# Altium PCB sim908-v5.PcbDoc
Units mil, origin at the board's own origin, x right, y up, seen from the top; angles counter-clockwise.
Board outline 9783 x 7978 mil, 2 copper layers (Top Layer, Bottom Layer); 67 components, 0 nets, 297 pads, 100 vias.
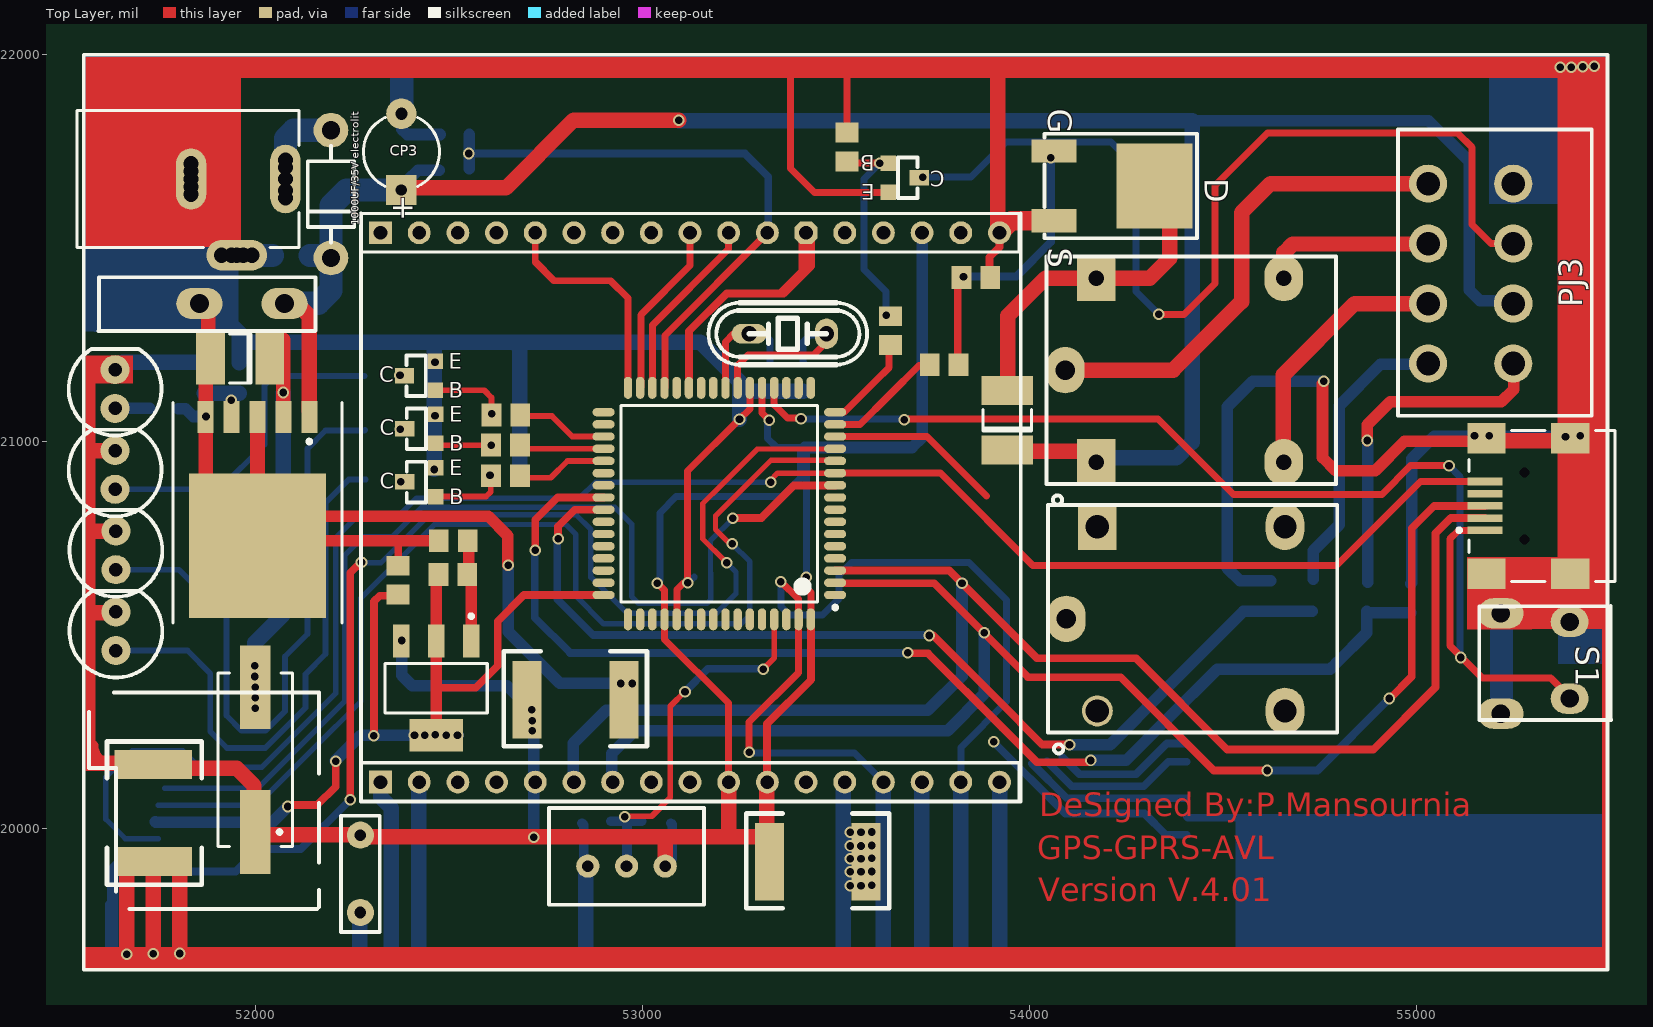
[diagram p0: Top Layer view]
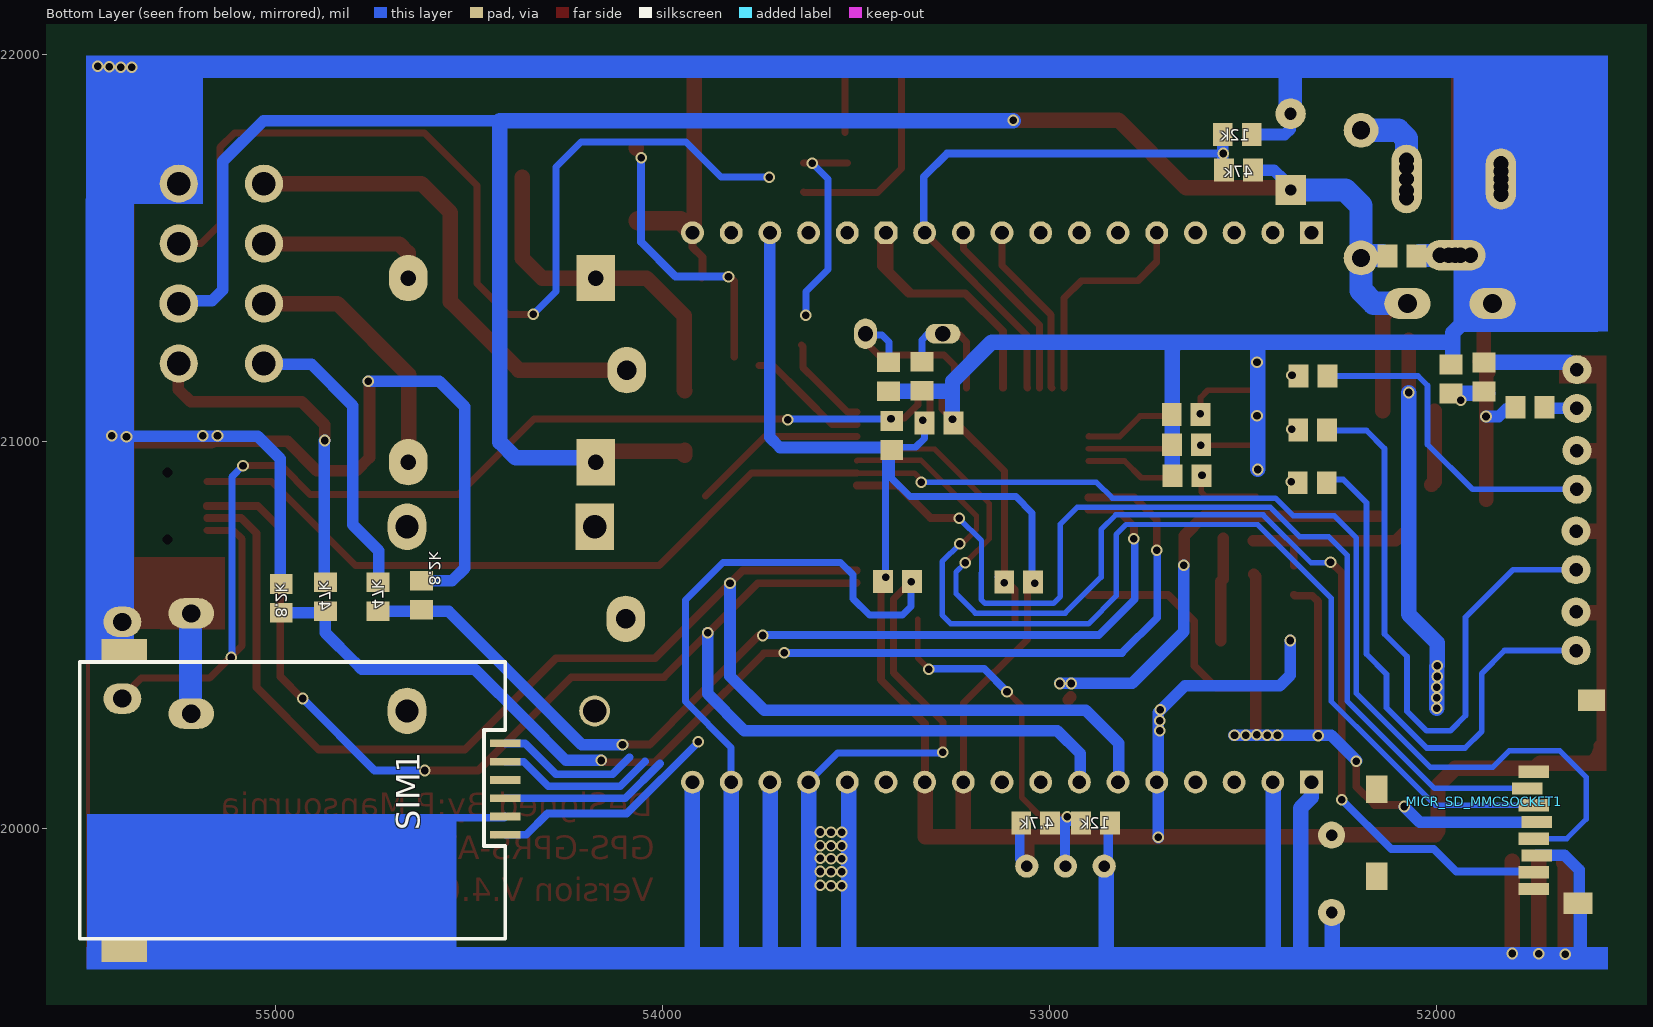
[diagram p1: Bottom Layer view, seen from below]

## Layer stack, top to bottom
Top Layer: signal copper 1.4
Dielectric: dielectric 12.6, FR-4, Dk 4.8
Bottom Layer: signal copper 1.4

## Board outline
48479,25131 48522,25174 58131,25174 58131,17327 58240,17218 58218,17196 48457,17196

## Design rules (kind name [scope] priority, off if disabled: settings)
Clearance [All] p1: gap=10
PolygonConnect [All] p1: connectstyle=Relief reliefconductorwidth=10 reliefentries=4 polygonreliefangle="90 Angle"
RoutingVias [All] p1: holewidth=28 width=50 viastyle="Through Hole" minholewidth=28 minwidth=50 maxholewidth=28 maxwidth=50
SilkscreenOverComponentPads [All] p1: minsilkscreentomaskgap=10
SolderMaskExpansion [All] p1: expansion=4
Width [All] p1: maxlimit=10 minlimit=10 preferedwidth=10
27 further rules are at their usual default settings.

## Components (designator, comment, footprint, x,y, rotation, side; value= is the part's Value field where it differs from the comment)
CP3 "1000UF/35V electrolit" CAPPR5-5x5 52376,21749 r90 top (schematic designator CP2)
MICR_SD_MMCSOCKET1 "" "PCBComponent_1 - duplicate" 51748,20147 r270 bottom locked
PJ3 "PowerCon8" HDRB2*4 55250,21667 r270 top
S1 "SW-PB" SW2 55396,20336 r270 top locked
SIM1 "SIMCard1" SIMCard1 54406,20220 r90 bottom locked
? "Comment" Relay_2#1 54635,20274 r90 top
? "Comment" USB/SM0.8-6H5 55486,20834 r0 top
? "Comment" 2012[0805] 51757,21089 r180 bottom
? "Comment" 2012[0805] 51961,21162 r90 bottom
? "Comment" 2012[0805] 51876,21167 r90 bottom
? "Comment" 2220 53577,19914 r180 top
? "Comment" MKT 52270,19783 r90 top
? "Comment" 2220 51735,19915 r90 top
? "Comment" 1812 51959,21215 r180 top
? "Comment" 2012[0805] 52088,21480 r0 bottom
? "Comment" "Diode Zener" 52164,21645 r270 top
? "Comment" Relay_2#2 54632,20917 r90 top
? "Comment" HDR1X17#1 52322,21540 r0 top locked
? "Comment" HDR1X17#2 52322,20120 r0 top locked
? "Comment" power 51537,21679 r0 top
? "Comment" LED1 51656,21096 r90 top locked
? "Comment" LED1 51656,20887 r90 top locked
? "Comment" LED1 51658,20470 r90 top locked
? "Comment" LED1 51658,20679 r90 top locked
? "Comment" ATMEGA128 53218,20840 r180 top
? "Comment" LM2576 52004,20897 r180 top
? "Comment" HC49/4H_SMX 51998,20178 r90 top
? "Comment" 2012[0805] 53392,20639 r180 bottom
? "Comment" 2012[0805] 53079,20637 r180 bottom
? "Comment" 2012[0805] 53285,21048 r180 bottom
? "Comment" 2012[0805] 53407,21016 r270 bottom
? "Comment" X2P 53375,21279 r0 top
? "Comment" 2012[0805] 53329,21169 r270 bottom
? "Comment" 2012[0805] 53415,21168 r270 bottom
? "" DPAK 54063,21751 r270 top
? "Comment" "mokhaberati 3pin" 53058,19903 r180 top
? "Comment" 2012[0805] 52880.4,20014 r0 bottom
? "Comment" 2012[0805] 53035,20014 r0 bottom
? "Comment" 2012[0805] 52511,21702 r180 bottom
? "Comment" 2012[0805] 52514,21794 r180 bottom
? "Comment" 2012[0805] 52646,21069 r0 top
? "Comment" 2012[0805] 52645,20991 r0 top
? "Comment" 2012[0805] 52645,20912 r0 top
? "Comment" SMD-tr 52464,21133 r0 top
? "Comment" SMD-tr 52465,20996 r0 top
? "Comment" SMD-tr 52465,20858 r0 top
? "Comment" 2012[0805] 52646,21070 r180 bottom
? "Comment" 2012[0805] 52645,20992 r180 bottom
? "Comment" 2012[0805] 52644,20912 r180 bottom
? "Comment" 2012[0805] 52318,21170 r180 bottom
? "Comment" 2012[0805] 52319,21030 r180 bottom
? "Comment" 2012[0805] 52320,20894 r180 bottom
? "Comment" 2012[0805] 53779,21199 r0 top
? "Comment" 2012[0805] 53861,21424 r180 top
? "Comment" 1812 53942,21055 r90 top
? "Comment" 2012[0805] 53640,21287 r90 top
? "Comment" SMD-tr 53635,21720 r180 top
? "Comment" 2012[0805] 53528,21762 r90 top
? "Comment" 2012[0805] 54871,20599 r270 bottom
? "Comment" 2012[0805] 54985,20595 r270 bottom
? "Comment" 2012[0805] 54735,20599 r90 bottom
? "Comment" 2012[0805] 54623,20603 r90 bottom
? "Comment" SOT223 52466,20363 r180 top
? "Comment" 2012[0805] 52509,20657 r0 top
? "Comment" 2012[0805] 52510,20744 r0 top
? "Comment" 2220 52951,20333 r180 top
? "Comment" 2012[0805] 52367,20642 r90 top

## Footprints (in the part's own frame and the unit in brackets; to place one, negate y for a bottom-side part, rotate by r counter-clockwise, add the part's x,y. Pads: shape width x height; smd on the part's side, far side on the other; paste and mask are expansions set on the pad)
1812 [mm] "Chip Capacitor; Body 4.5 x 3.2 mm (LxW typ)"
  rect 1.9x3.4 smd: 1(-1.95,0) 2(1.95,0)
  silkscreen extent -0.7,-1.6 0.7,1.6
2012[0805] [mm] "Chip Resistor; Body 2.0 x 1.3 mm (LxW typ)"
  rect 1.3x1.5 smd: 1(-0.95,0) 2(0.95,0)
2220 [mil]
  rect 75x200 smd: GND(0,0) VCC(250,0)
  silkscreen extent -60,-125 310,120
ATMEGA128 [mm] "mega128-64"
  oval 1.45x0.55 smd: 1PIN(-7.092,6) 2(-7.092,5.2) 3(-7.092,4.4) 4(-7.092,3.6) 5(-7.092,2.8) 6(-7.092,2) 7(-7.092,1.2) 8(-7.092,0.4) 9(-7.092,-0.4) 10(-7.092,-1.2) 12(-7.092,-2.8) 13(-7.092,-3.6) 14(-7.092,-4.4) 15(-7.092,-5.2) 16(-7.092,-6) 33(8.108,-6) 34(8.108,-5.2) 35(8.108,-4.4) 36(8.108,-3.6) 37(8.108,-2.8) 38(8.108,-2) 39(8.108,-1.2) 40(8.108,-0.4) 41(8.108,0.4) 42(8.108,1.2) 43(8.108,2) 44(8.108,2.8) 45(8.108,3.6) 46(8.108,4.4) 47(8.108,5.2) 48(8.108,6) CLK(-7.092,-2)
  oval 0.55x1.45 smd: 17(-5.492,-7.6) 18(-4.692,-7.6) 19(-3.892,-7.6) 20RST(-3.092,-7.6) 21VCC(-2.292,-7.6) 22GND(-1.492,-7.6) 23XTALL(-0.692,-7.6) 24XTALL(0.108,-7.6) 25(0.908,-7.6) 26(1.708,-7.6) 27(2.508,-7.6) 28(3.308,-7.6) 29(4.108,-7.6) 30(4.908,-7.6) 31(5.708,-7.6) 32(6.508,-7.6) 49(6.508,7.6) 50(5.708,7.6) 51(4.908,7.6) 52VCC(4.108,7.6) 53GND(3.308,7.6) 54(2.508,7.6) 55(1.708,7.6) 56(0.908,7.6) 57(0.108,7.6) 58(-0.692,7.6) 59(-1.492,7.6) 60(-2.292,7.6) 61(-3.092,7.6) 62AREF(-3.892,7.6) 63GND(-4.692,7.6) 64AVCC(-5.492,7.6)
  silkscreen extent -7.22,-6.45 6.96,6.95, body extent -6.49,-7 7.51,7, height 1.2
CAPPR5-5x5 [mm] "Capacitor, Electrolytic, Radial; Body 5 x 5 mm (Dia.xH typ); Pin Spacing 5 mm (typ)"
  rect 2x2 hole 0.75: 1(-2.5,0)
  round 2 hole 0.8: 2(2.5,0)
  silkscreen extent -2.26,-2.5 2.27,2.5
"Diode Zener" [mil]
  round 90 hole 47: A(-160,30) K(170,30)
  silkscreen extent -120,-30 130,90
DPAK [mil]
  rect 60x116 smd: 1(0,0) 3(180,0)
  rect 220x196 smd: 2(90,260)
  silkscreen extent -45,-25 225,370
HC49/4H_SMX [mm] "Quartz Crystal, SM; Body 13.4 (inc. leads) x 4.9 mm (LxW max)"
  rect 5.5x2 smd: 1(-4.75,0) 2(4.75,0)
  silkscreen extent -5.7,-2.45 5.7,2.45
HDR1X17#1 [mm] "Connector; Header; 17 Position"
  rect 1.5x1.5 hole 0.9: 1(0,0)
  round 1.5 hole 0.9: 2(2.54,0) 3(5.08,0) 4(7.62,0) 5led(10.16,0) 6(12.7,0) 7(15.24,0) 8(17.78,0) 9ring(20.32,0) 10pwr(22.86,0) 11(25.4,0) 13(30.48,0) 14(33.02,0) 15vcc(35.56,0) 16(38.1,0) 17(40.64,0)
  oct 1.5x1.5 hole 0.9: 12rxgps(27.94,0)
  silkscreen extent -1.27,-1.27 41.91,1.27
HDR1X17#2 [mm] "Connector; Header; 17 Position"
  rect 1.5x1.5 hole 0.9: 1(0,0)
  round 1.5 hole 0.9: 2(2.54,0) 3(5.08,0) 4(7.62,0) 5(10.16,0) "6rx gsm"(12.7,0) "7 tx gsm"(15.24,0) 8(17.78,0) 9(20.32,0) 10(22.86,0) 11(25.4,0) 12(27.94,0) 13(30.48,0) 14(33.02,0) 15(35.56,0) 16(38.1,0) 17(40.64,0)
  silkscreen extent -1.27,-1.27 41.91,1.27
HDRB2*4 [mil]
  round 98.43 hole 61: A-c5(465,0) A-c6(465,-220) ALARM(155,0) GND(0,0) R(0,-220) R(155,-220) R(310,-220)
  oval 98.43x100.39 hole 61: VDD-12V(310,0)
  silkscreen extent -140,-298 600,203
LED1 [mil]
  round 75 hole 35: 1(-10,20) 2(90,20)
  silkscreen extent -80,-100 144,140
LM2576 [mm]
  rect 1.05x2.1 smd: 1(-3.4,-4.225) 2(-1.7,-4.225) 3(0,-4.225) 4(1.7,-4.225) 5(3.4,-4.225)
  rect 9x9.5 smd: 6(0,4.225)
  silkscreen extent -5.55,-5.17 5.55,9.28
MKT [mil]
  round 70 hole 30: 1(0,0) 2(200,0)
  silkscreen extent -50,-50 250,50
"mokhaberati 3pin" [mil] "3pin"
  round 60 hole 30: 0(0,0) 1(100,0) 2(200,0)
  silkscreen extent -100,-150 300,100
"PCBComponent_1 - duplicate" [mm]
  rect 0.8x2 smd: 1(0,0) 2(1.1,-0.4) 3(2.2,0) 4(3.3,0.2) 5(4.4,0) 6(5.5,0.2) 7(6.6,0) 8(7.7,0)
  rect 1.4x1.9 smd: 9(8.643,2.918)
  rect 1.8x1.4 smd: 10(6.865,-10.29) 11(1.15,-10.29)
  rect 1.4x1.75 smd: 12(-4.692,3.807)
power [mm] "DC Power Jack, 2.5mm, KLD Series, PCB Mount"
  round 1.5 hole 1: 0(7.5,-0.508) 0(7.5,0) 0(7.5,0.508) 0(10.16,-5) 0(10.922,-5) 0(13.7,-0.762) 0(13.7,0.762) 1(13.7,0) 1A(13.7,-1.25) 1B(13.7,1.25) 2(10.5,-5) 2A(7.5,-1) 2B(7.5,1) 3A(9.5,-5) 3B(11.5,-5)
  oval 2x4.5 all layers, no hole: 1(13.7,0)
  oval 2x4 all layers, no hole: 2(7.5,0)
  oval 4x2 all layers, no hole: 3(10.5,-5)
  silkscreen extent 0,-4.5 14.6,4.5
Relay_2#1 [mil]
  round 80 hole 60: 1(30,460)
  oval 120x100 hole 60: 2(30,-25) 3(506,-25)
  rect 120x100 hole 60: 4(506,460)
  oval 120x100 hole 50: 5(268,540)
  silkscreen extent -80,-160 562,588
Relay_2#2 [mil]
  rect 120x100 hole 40: 1(30,460) 4(506,460)
  oval 120x100 hole 40: 2(30,-25) 3(506,-25)
  oval 120x100 hole 50: 5(268,540)
  silkscreen extent -80,-160 562,588
SIMCard1 [mm]
  rect 1.524x3 smd: 0(-13.589,25.019) 0(6.096,25.019)
  rect 0.5x2 smd: 1(SIM-VCC)(-6,0) 2(SIM_RST)(-3.6,0) 3(SIM_CLK)(-1.2,0) 4(GND)(-4.8,0) 5(-2.4,0) 6(SIM_DATA)(0,0)
  silkscreen extent -12.83,0 5.33,27.94
SMD-tr [mil]
  rect 40x40 smd: 1(0,0) 2(0,75)
  rect 50x40 smd: 3(-80,38)
  silkscreen extent -75,-15 -25,90
SOT223 [mm] "SOT-223/SC-73; 4 Leads; Body 6.7 x 7.3 mm, inc. leads (LxW max)"
  rect 1.1x2.15 smd: 1adj(-2.3,-3.1) 2(0,-3.1) 3In(2.3,-3.1)
  rect 3.5x2.15 smd: 4(0,3.1)
  silkscreen extent -3.35,-4.85 3.35,1.63
SW2 [mm]
  oval 2x2.5 hole 1.2: 1(0,0) 2(-5.029,-0.001)
  oval 2x3 hole 1.2: 3(0.991,-4.522) 4(-5.588,-4.522)
  round 0 all layers, no hole: 8(-4.648,-5.562) 9(-0.457,-5.638)
  silkscreen extent -6.07,-5.94 1.4,2.72
USB/SM0.8-6H5 [mm] "Connector; USB2.0, Type B, SM; 5 Position; Right Angle"
  rect 2.3x0.5 smd: 1rst(-7.85,-1.6) 2miso(-7.85,-0.8) 3mosi(-7.85,0) 4(-7.85,0.8) 5clk(-7.85,1.6)
  rect 2.5x2 smd: 6(-7.75,4.45) 7(-2.25,4.45) 8(-7.75,-4.45) 9(-2.25,-4.45)
  round 0.346 hole 0.646 unplated: MH1(-5.25,2.2) MH2(-5.25,-2.2)
  silkscreen extent -9.67,-4.95 0.7,4.95
X2P [mm]
  oval 2.3x1.3 hole 1: 1(-2.54,0)
  oval 1.5x2 hole 1: 2(2.54,0)
  silkscreen extent -5.21,-2.03 5.21,2.03

## Part data
CP3: library part "Cap Pol3", "Polarized Capacitor (Surface Mount)"
MICR_SD_MMCSOCKET1: library part "Header 12", "Header, 12-Pin"
S1: "Switch"

## Free pads (board coordinates)
  oval 120x80 hole 50: 3(51854,21357) 3(52074,21357)

## Via types
v1: diameter 30, hole 19.68, Top Layer to Bottom Layer, 100 vias

## Nets (pads, with @x,y where several pads share a name; then routed paths per layer and width w, separated by ;. In a path a pad name is that pad's centre, name@x,y a point inside that pad or via, vN(x,y) a via of type N, cw(c..) or ccw(c..) an arc to the next point about the centre after c; other vN are vias at no path point)
pads on no net: "?.6rx gsm" "?.7 tx gsm" ?.0 ?.1 ?.1A ?.1adj ?.1B ?.1PIN ?.1rst ?.2 ?.2A ?.2B ?.2miso ?.3 ?.3A ?.3B ?.3In ?.3mosi ?.4 ?.5 ?.5clk ?.5led ?.6 ?.7 ?.8 ?.9 ?.9ring ?.10 ?.10pwr ?.11 ?.12 ?.12rxgps ?.13 ?.14 ?.15 ?.15vcc ?.16 ?.17 ?.18 ?.19 ?.20RST ?.21VCC ?.22GND ?.23XTALL ?.24XTALL ?.25 ?.26 ?.27 ?.28 ?.29 ?.30 ?.31 ?.32 ?.33 ?.34 ?.35 ?.36 ?.37 ?.38 ?.39 ?.40 ?.41 ?.42 ?.43 ?.44 ?.45 ?.46 ?.47 ?.48 ?.49 ?.50 ?.51 ?.52VCC ?.53GND ?.54 ?.55 ?.56 ?.57 ?.58 ?.59 ?.60 ?.61 ?.62AREF ?.63GND ?.64AVCC ?.A ?.CLK ?.GND ?.K ?.MH1 ?.MH2 ?.VCC CP3.1 CP3.2 MICR_SD_MMCSOCKET1.1 MICR_SD_MMCSOCKET1.2 MICR_SD_MMCSOCKET1.3 MICR_SD_MMCSOCKET1.4 MICR_SD_MMCSOCKET1.5 MICR_SD_MMCSOCKET1.6 MICR_SD_MMCSOCKET1.7 MICR_SD_MMCSOCKET1.8 MICR_SD_MMCSOCKET1.9 MICR_SD_MMCSOCKET1.10 MICR_SD_MMCSOCKET1.11 MICR_SD_MMCSOCKET1.12 PJ3.A-c5 PJ3.A-c6 PJ3.ALARM PJ3.GND PJ3.R PJ3.VDD-12V S1.1 S1.2 S1.3 S1.4 S1.8 S1.9 SIM1.0 SIM1.1(SIM-VCC) SIM1.2(SIM_RST) SIM1.3(SIM_CLK) SIM1.4(GND) SIM1.5 SIM1.6(SIM_DATA)
copper on no net: | length 87060.2
  Top Layer w14: v1@53210,20691 53210,20694 53155,20749 53155,20840 53203,20888 53296,20981 53497.94,20981 ; v1@53226,20735 53188,20773 53188,20808 53236,20856 53332,20952 53495.45,20952 53497.21,20950.24 ; v1@53329,20899 53348.74,20918.74 53497.21,20918.74
  Top Layer w15: 52464,21133 52590,21133 52608.6,21114.4 v1@52608.6,21069 ; 52465,20858 52595,20858 52607,20870 52607,20910.6 v1@52605.6,20912 ; 52465,20996 52470,20991 v1@52607.6,20991 ; 52678.73,20981.73 52898.79,20981.73 ; 52680.4,20912 52685.4,20907 52762,20907 52805.24,20950.24 52898.79,20950.24 ; 52683.4,21069 52686.4,21066 52765,21066 52817.77,21013.23 52898.79,21013.23 52897.02,21015 ; v1(52953,20030) 52955,20032 53023,20032 53071,20080 53071,20316 v1(53109,20354) ; v1(53311,20412) 53339.73,20440.73 53339.73,20540.79
  Top Layer w18: 52722,21540 52722,21465 52771,21416 52917,21416 52961.78,21371.22 52961.78,21139.21 ; 52993.28,21139.21 52995,21140.94 52995,21328 53122,21455 53122,21540 ; 53024.77,21139.21 53025,21139.44 53025,21301 53222,21498 53222,21540 ; v1@53038,20634 53056,20616 53056,20541.06 ; 53056.27,20540.79 53056,20541.06 ; 53056.27,21139.21 53056,21139.48 53057,21140.48 53057,21275 53322,21540 ; 53087.76,20540.79 53088,20541.02 53088,20618 53105,20635 v1(53116,20635) 53116,20924 v1@53252,21060 ; 53213.75,21139.21 53214,21139.46 53214,21258 53235,21279 53275,21279 ; 53222,20120 53221,20121 53221,20324 53056,20489 53056,20541.06 ; 53245.24,21139.21 53245.24,21197.24 53272,21224 53441,21224 53475,21258 53475,21279 ; v1@53249,21057 53276.74,21084.74 53276.74,21139.21 ; v1(53275,20197) 53275,20275 53402.72,20402.72 53402.72,20540.79 53402,20541.51 53402,20593 v1(53357,20638) ; 53308.24,21139.21 53308.24,21073.76 v1@53326,21056 ; 53339.73,21139.21 53339.73,21095.27 53342,21093 53374,21061 v1@53408,21061 ; 53387,21960 53382,21955 53382,21706 53444,21644 53634,21644 53635,21645 ; v1(53423,20650) 53423,20622 53435,20610 53435,20540.01 ; 53497.21,20918.74 53769.26,20918.74 54008,20680 54793,20680 55009.99,20896.99 55176.94,20896.99 ; 53497.21,21013.23 53734.77,21013.23 53888,20860 ; 53497.21,21044.72 53561.72,21044.72 53637,21120 53714,21197 53750,21197 ; 53497.21,21076.22 53521.22,21076.22 53600,21155 53637,21192 53637,21246.6 53640,21249.6 ; 53521,21720 53635,21720 ; 53528,21799.4 53528,21955 53541,21968 ; v1@53676,21059 54332,21059 54527,20864 54911,20864 54985,20938 v1(55084,20938) ; v1(54334,21329) 54399,21329 54479,21409 54479,21662 54615,21798 55106,21798 55143,21761 55143,21561 55192,21512 55250,21512 ; 55176.45,20803 55176.94,20802.5 ; 55176.94,20771.01 55175.94,20770 55108,20770 55086,20748 55086,20473 55170,20389 55347,20389 55405,20331 ; 55248,21355 55250,21357 ; 53497.21,20981.73 53497.94,20981 53497.21,20981.73
  Top Layer w20: v1(52082,20057) 52086,20061 52159,20061 52206,20108 v1(52206,20174) ; v1(52244,20074) 52244,20661 v1@52272,20689 ; v1(52305,20240) 52305,20587 52320,20602 52364.4,20602 52367,20604.6 ; 52367,20679.4 52368,20680.4 52368,20740 ; 52470,20363 52471,20364 52568,20364 52625,20421 52625,20536 52692.78,20603.78 52898.79,20603.78 ; v1(52722,20719) 52722,20798 52780,20856 52898.54,20856 52898.79,20855.75 ; v1(52781,20749) 52781,20781 52824,20824 52824.25,20824.25 52898.79,20824.25 ; 53119.26,21139.21 53119.26,21285.26 53217,21383 53355,21383 53422,21450 53422,21540 ; v1@53235,20803 53307,20803 53391,20887 53496.97,20887 53497.21,20887.24 ; 53321,20119 53321,20271 53435,20385 53435,20540.01 53434.22,20540.79 ; 53338,21383 53364,21383 53435,21454 53435,21528 ; 53413,21446 53413,21520 ; 53497.21,20635.28 53498.49,20634 53753,20634 53996,20391 54235,20391 54476,20150 v1(54614,20150) ; 53497.21,20666.77 53497.44,20667 53792,20667 54019,20440 54275,20440 54511,20204 54888,20204 55049,20365 55049,20763 55089,20803 55176.45,20803 ; v1@53685,20453 53737,20453 53930,20260 54019,20171 54153,20171 v1(54158,20176) ; v1(53740,20499) 53751,20499 53916,20334 54033,20217 v1(54103,20217) ; 53814,21219.6 53814,21414.4 v1@53823.6,21424 ; 53898.4,21424 53896,21426.4 53896,21477 53922,21503 53922,21540 ; v1@54930.5,20335.5 54988,20393 54988,20776 55046,20834 55177.95,20834
  Top Layer w30: 51578,20214 ccw(c51628,20214) 51628,20164 51641,20164 ; 52082,20766 52104,20744 52403,20744 52472.6,20744 ; 52145,20807 52601,20807 52651,20757 v1@52651,20681 ; v1@52466,20240.95 52466,20485.05 52466,20651.4 52471.6,20657 ; 52550,20750.4 52550,20645 52556.55,20638.45 52556.55,20485.05 ; 52944,20340 52951,20333 ; v1@54757,21150 54757,20959 54791,20925 54893,20925 54969,21001 55294,21001 55296,21003 55396,21003 55400,20999 ; v1(54873,21003) 54873,21044 54932,21103 55219,21103 55251,21135 55251,21212
  Top Layer w38: 51854,21357 51877,21334 51877,21218 51887,21208 ; 51865,21180 51870.14,21174.86 v1@51870.14,21063.34 ; 51870,20850 51870,21079.2 v1@51870.14,21079.34 ; 52004,21079.34 52004,20897 52012,20889 ; 52070.93,21079.34 52070.93,21263
  Top Layer w40: 51581,20976 51582,20977 51636,20977 ; 51583,20169 51731,20169 51739.5,20160.5 ; 51586,20558 51636,20558 51638,20560 ; 51586,20769 51638,20769 ; v1@51666,19673 51666,19907 51670,19911 ; v1(51735,19676) 51735,19916 ; 51735,20165 51744,20156 51950,20156 51995,20111 51995,19993.99 51998,19990.99 ; v1(51803,19677) 51803,19915 ; 52002,19984 52269,19984 ; 52074,21357 52106,21357 52137.86,21325.14 52137.86,21079.34 ; 52270,19983 52269,19984 ; 52376,21650.57 52381.43,21656 52646,21656 52821,21831 v1(53093,21831) ; 53058,19903 53058,19974 53061,19977 ; 53079,19979 53321,19979 53321,20119 53322,20120 ; 53222,20120 53222,19979 52274,19979 52269,19984 ; 53918,21959 53918,21544 53922,21540 ; 53942,20978.23 53942,20965 53952,20975 54144,20975 54172,20947 ; 53942,21131.77 53943,21132.77 53943,21325 54041,21423 54172,21423 54173,21422 54310,21422 54362,21474 54362,21683 ; 54067,21760 54068,21759 ; 54092,21185 54371,21185 54548,21362 54548,21592 54623,21667 55030,21667 ; 54657,20947 54656,20948 54656,21173 54840,21357 55030,21357 ; 54657,21423 54657,21488 54680,21511 54701,21511 55018,21511 55025,21518 ; 55165.88,21002.2 v1@55382.42,21002.2
  Top Layer w50: 53922,21540 53953,21571 54063,21571
  Bottom Layer w14: 51740.05,20017 51740.13,20017.08 ; 51748,19887.16 51749.84,19889 ; 51748,19973.77 51662.23,19973.77 51612,20024 51612,20133 51680,20201 51811,20201 51854,20158 52015,20158 52206,20349 52206,20751 52263,20808 52369,20808 52415,20854 52837,20854 52878,20895 v1(53331,20895) ; 51748,20060.39 52002.39,20060.39 52146,20204 52271,20329 52271,20596 52461,20786 52801,20786 52827,20760 52827,20601 52899,20529 53254,20529 53277,20552 53277,20690 v1(53231,20736) ; 51763.75,20103.69 52003.69,20103.69 52230,20330 52230,20707 52277,20754 52352,20754 52429,20831 52927,20831 52971,20787 52971,20600 52989,20582 53166,20582 53176,20592 53176,20660 53175,20661 53175,20744 v1(53233,20802) ; v1@52273,20687 52323,20687 52447,20811 52828,20811 52866,20773 52866,20650 52959,20557 53191,20557 53241,20607 53241,20663 v1(53217,20687)
  Bottom Layer w15: 51636,20877 51906,20877 52022,20993 52022,21145 52047,21170 52280.6,21170 ; 51638,20460 51823,20460 51882,20401 51882,20251 51925,20208 52024,20208 52128,20312 52128,20399 52180,20451 52180,20842 52240,20902 52284,20902 ; 51638,20669 51801,20669 51924,20546 51924,20292 51963,20253 52025,20253 52075,20303 52075,20445 52133,20503 52133,20982 52180,21029 52280.6,21029 52281.6,21030 ; 52376,21650.57 52395,21669.57 52395,21678 ; 52376,21847.43 52377,21846.43 ; 52548.4,21702 52551.4,21705 ; 53322,21540 53324,21542
  Bottom Layer w18: v1(53037,20634) 53044,20641 53044,20816 53086,20858 53360,20858 53407,20905 53407,20985.6 53345.4,20985.6 53322.4,21008.6 v1@53322.4,21054 ; 53129,20646 53133,20650 ; 53275,21279 53313,21279 53329,21263 53329,21206.4 ; v1@53281,20195 53379,20195 53547,20195 53622,20120 ; v1(53357,20638) 53357,20574 53379,20552 53465,20552 53507,20594 53507,20656 53539,20688 53843,20688 53940,20591 53940,20328 53822,20210 53822,20120 ; v1(53409,21059) v1@53676,21059 ; 53414.4,21130 53415,21130.6 ; 53415,21205.4 53414,21206.4 53414,21258 53432,21276 53472,21276 53475,21279 ; 53419,20985 53415,20989 53423,20981 v1(53423,20650) ; v1(53613,21720) 53572,21679 53572,21445 53629,21388 v1(53629,21326.4) ; 53722,21367 53727,21372 ; v1(53724,21684) 53848,21684 53939,21775 54210,21775 54275,21710 54275,21388 v1(54334,21329) ; v1(55084,20938) 55113,20909 55113,20442 v1(55114,20442)
  Bottom Layer w20: 51620,19667 51620,19804 51623,19807 ; 51749.84,19889 51948,19889 52006,19947 52116,19947 v1@52243.5,20074.5 ; v1(52550,21745) 53264,21745 53324,21685 53324,21542 ; v1@52721,20719 52721,20545 52812,20454 v1(53685,20454) ; v1@52779,20749 52779,20593 52872,20500 53582,20500 v1@53741,20500 ; v1(53109,20354) 53168,20413 v1@53310,20413 ; v1@53825,21427 53966,21427 54055,21516 v1(54055,21734) ; v1@53907.5,20223.5 54092,20039 54297,20039 54352,19984 54405.78,19984 54406,19983.78 ; 54006,20168 54096,20078 54405.73,20078 54406,20078.27 ; 54045,20173 54109,20109 54295,20109 54358.76,20172.76 54406,20172.76 ; 54085,20184 54129,20140 54275,20140 54355,20220 54406,20220 ; 54406,20031.02 54409.02,20028 54629,20028 54697,19960 54697,19656 ; v1(54614,20150) 54744,20150 v1(54930,20336) ; 55217.97,20296.98 55220,20299.02
  Bottom Layer w25: 52843,20014 52847,20010 52847,19914 52858,19903 ; 52917.8,20019 52997.6,20019 ; 52958,19903 52959,19904 52959,20016 ; 53058,19903 53076,19921 53076,20010.4 53072.4,20014
  Bottom Layer w30: 51630,19680 51630,19893 51668,19931 51739.59,19931 51740.13,19930.46 ; 51636,21086 51725.6,21086 ; 51740.13,20017.08 51741.2,20016 52042,20016 v1@52082,20056 ; 51799,21085 51818,21085 51838,21065 v1(51871,21065) ; v1@52205,20175 52271,20241 v1@52523,20241 ; v1(52377,20486) 52377,20396 52404,20369 52649,20369 52718,20300 v1@52718,19976 ; 52377,21846.43 52377,21808 52391,21794 52476.6,21794 ; 52395,21678 52419,21702 52473.6,21702 ; 52551.4,21705 52551.4,21794 ; v1(52652,20681) 52652,20509 52785,20376 v1@52973,20376 ; 52822,20120 52820,20122 52820,20220 52906,20306 53737,20306 53825,20394 v1(53825,20634) ; 52922,20120 52920,20122 52920,20194 52979,20253 53788,20253 53883,20348 v1(53883,20506) ; 53419,20985 53696,20985 53722,21011 53722,21540 ; 54082,21830 55031,21830 55136,21725 55136,21569 55136,21392 55164,21364 55243,21364 55250,21357 ; v1(54103,20217) 54208,20217 54350,20359 54552.6,20561.6 54730,20561.6 54620.4,20561.6 ; v1(54158,20176) 54249,20176 54356,20283 54485,20412 54777,20412 54793,20428 54871,20506 54871,20561.6 ; 54623,20640.4 54543.6,20640.4 54511,20673 54511,21090 54577,21156 v1(54760,21156) ; 54733,20644 54733,20718 54800,20785 54800,21093 54907,21200 55028,21200 55030,21202 ; v1(54873,21003) 54874,21002 54874,20637 ; 54985,20557.6 54875,20557.6 ; 54985,20632.4 54988,20635.4 54988,20956 55046,21014 v1@55424,21014 ; 54871,20561.6 54875,20557.6 ; 54871,20561.6 54875,20557.6
  Bottom Layer w40: 51636,21186 51655.4,21205.4 51860,21205.4 ; 51866,21124.6 51957,21124.6 ; 51897,21341 51957,21281 51957,21204.4 ; 51959,21257 53149,21257 53250,21156 v1(53250,21058) ; v1(51997,20421) 51997,20480 52071,20554 v1(52071,21127) ; v1(51998,20311) v1@51998,20420 ; 52268,19662 52268,19781 52270,19783 ; 52322,20120 52322,20081 52350,20053 52350,19670 52345,19665 ; 52421,19671 52421,20119 52422,20120 ; v1@52461,20929 52461,21256 ; 52673,21252 52681.4,21243.6 52681.4,20912 ; 52853,19678 52853,19898 52858,19903 ; v1@53093,21830 54420,21830 54420,20999 54379,20958 54183,20958 54172,20947 ; 53254,21130 53414.4,21130 ; 53518,19665 53518,20116 53522,20120 ; 53622,19676 53622,20120 ; 53721,19675 53721,20119 53722,20120 ; 53821,19673 53822,19674 53822,20120 ; 53918,21967 53922,21963 ; 53922,20120 53923,20119 53923,19684
  Bottom Layer w60: 51950.39,21482.15 51951.54,21481 52042,21481 ; 52074,21357 52075,21358 52161,21358 52194,21391 52194,21475 ; 52076.37,21679 52076.37,21783.37 52098,21805 52194,21805 ; 52140,21481 52188,21481 52194,21475 ; 52193,21474 52194,21475 ; 52376,21650.57 52234.57,21650.57 52194,21610 52194,21475 ; 52376,21847.43 52377,21848.43 52377,21961 ; 55220,20299.02 55220,20565
  other v1: 51666,19675 53536,19852 53564,19852 53591.99,19853 53536,19888 53564,19888 53591.99,19889 53536,19922 53564,19922 53591.99,19923 53536,19955 53564,19955 53591.99,19956 52718,19977 53536,19990 53564,19990 53591.99,19991 53907,20224 52410,20241 52436,20241 52492,20241 52521,20241 52464,20242 52714,20253 52714,20279 52713,20307 51998,20338 51998,20365.01 52943,20375 52973,20375 51997,20393 52273,20688 52374.4,20896 52605,20913 52461,20928 52608,20991 55385,21013 55150,21015 55188,21015 55423,21015 52373.4,21032 53327,21055 53676,21057 52463,21067 52610,21072 51936,21107 52372.4,21172 52463,21205 53829,21426 55372,21968 55400,21968 55430,21969 55459,21970

## Other copper
Top Layer:
  rectangle: 51559,21940 55487,21994
  rectangle: 51557,19640 55490,19694
  rectangle: 55479,19640 55490,20611
  rectangle: 55130,20515 55299,20667
  rectangle: 55130,20610 55477,20702
  rectangle: 55292,20516 55488,20612
  rectangle: 51559,21150 51682,21223
  rectangle: 51559,20149 51585,21223
  rectangle: 55364,20602 55490,21993
  rectangle: 51559,21503 51961,21994
  text "DeSigned By:P.Mansournia" at 54025,20032 h60
  text "GPS-GPRS-AVL" at 54019,19921 h60
  text "Version V.4.01" at 54022,19812 h60
Bottom Layer:
  rectangle: 51556,21285 51592,21996
  rectangle: 51582,21284 51955,21964
  rectangle: 51556,19636 55488,19694
  rectangle: 51556,21940 55489,21998
  rectangle: 55187,21614 55490,21998
  rectangle: 55366,20425 55491,21628
  rectangle: 54532,19636 55487,20038

## Silkscreen, mask and mechanical layers (free items; w line width, h text height)
Top Overlay:
  lines w10: 52272,21590 52272,20070 53977,20070 53977,21590 ; 51555,19635 51555,22000 55494,22000 55494,19635 51555,19635 ; 51593,21286 52153,21286 52154,21287 52154,21425 51595,21425 51594,21424 51594,21287 51593,21286
Bottom Overlay:
  text "12k" at 52481,21778 h30
  text "47k" at 52473,21683 h30
  text "8.2k" at 54603,20627 h30 r90
  text "47k" at 54750,20567 h30 r90
  text "47k" at 54887,20563 h30 r90
  text "8.2k" at 54999,20545 h30 r90
  text "12k" at 52843,20000 h30
  text "4.7k" at 52987,20000 h30

## Text inside footprints (layer, text, board x,y; h text height)
CP3: Top Overlay "+" at 52405.53,21569.87 h59.06 r90
?: Mechanical 1 "PCB Edge" at 55503.02,20675.09 h9.84 r90
?: Top Overlay "S" at 54048,21501 h60 r270; Top Overlay "G" at 54048,21861 h60 r270; Top Overlay "D" at 54453,21681 h60 r270
?: Top Overlay "C" at 52319,21153 h40; Top Overlay "E" at 52499,21188 h40; Top Overlay "B" at 52499,21113 h40
?: Top Overlay "C" at 52320,21016 h40; Top Overlay "E" at 52500,21051 h40; Top Overlay "B" at 52500,20976 h40
?: Top Overlay "C" at 52320,20878 h40; Top Overlay "E" at 52500,20913 h40; Top Overlay "B" at 52500,20838 h40
?: Top Overlay "C" at 53780,21700 h40 r180; Top Overlay "E" at 53600,21665 h40 r180; Top Overlay "B" at 53600,21740 h40 r180